# Altium PCB PCB1.PcbDoc (part 1 of 3)
Units mm, origin at the board's own origin, x right, y up, seen from the top; angles counter-clockwise.
Board outline 100 x 100 mm, 2 copper layers (Top Layer, Bottom Layer); 16 components, 62 nets, 154 pads, 113 vias.
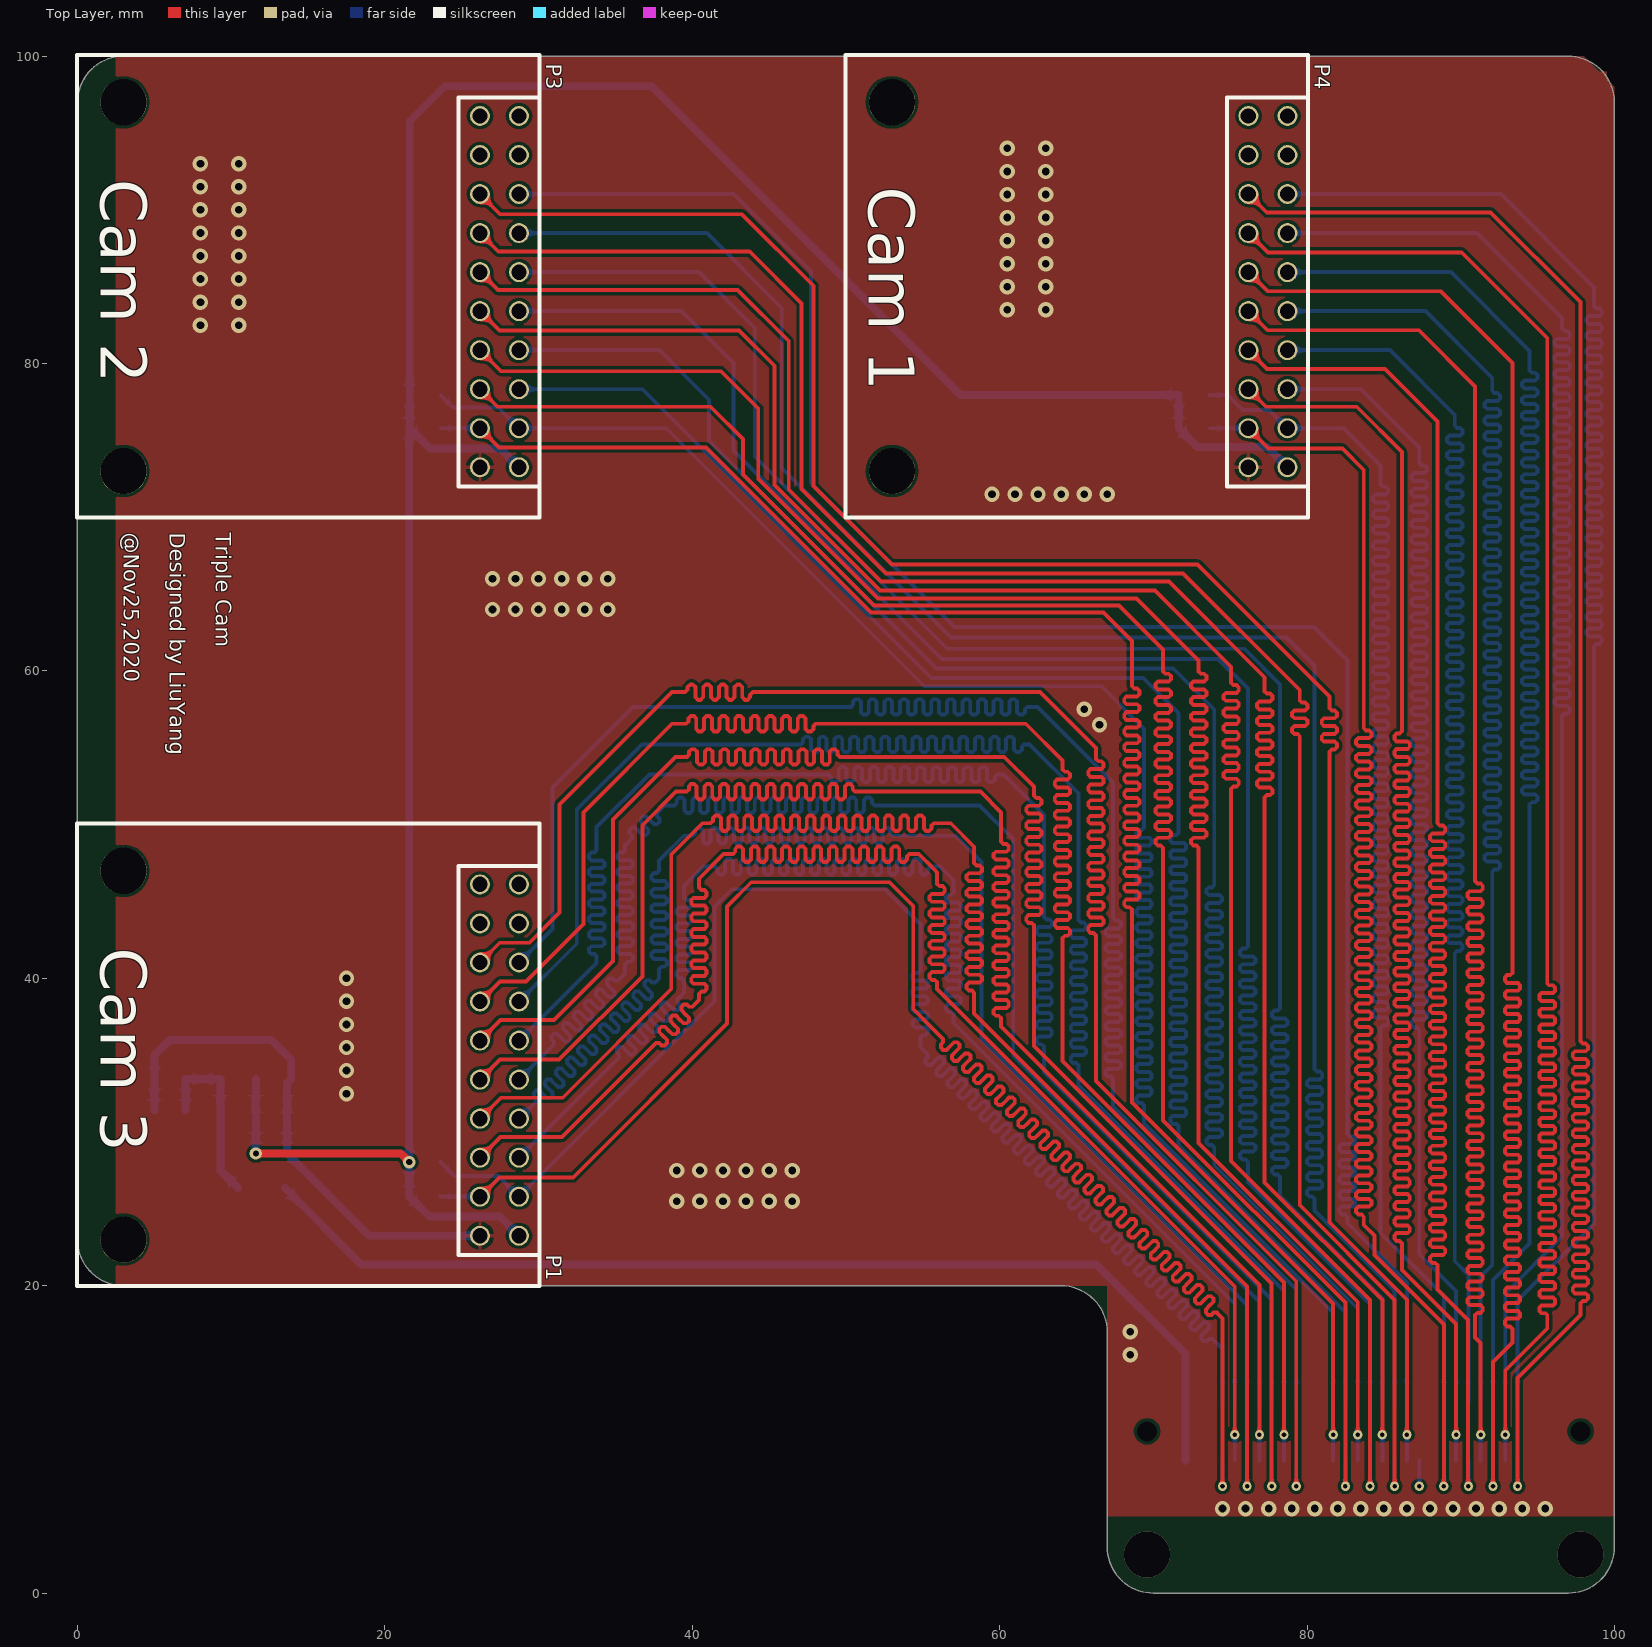
[diagram p0: Top Layer view]
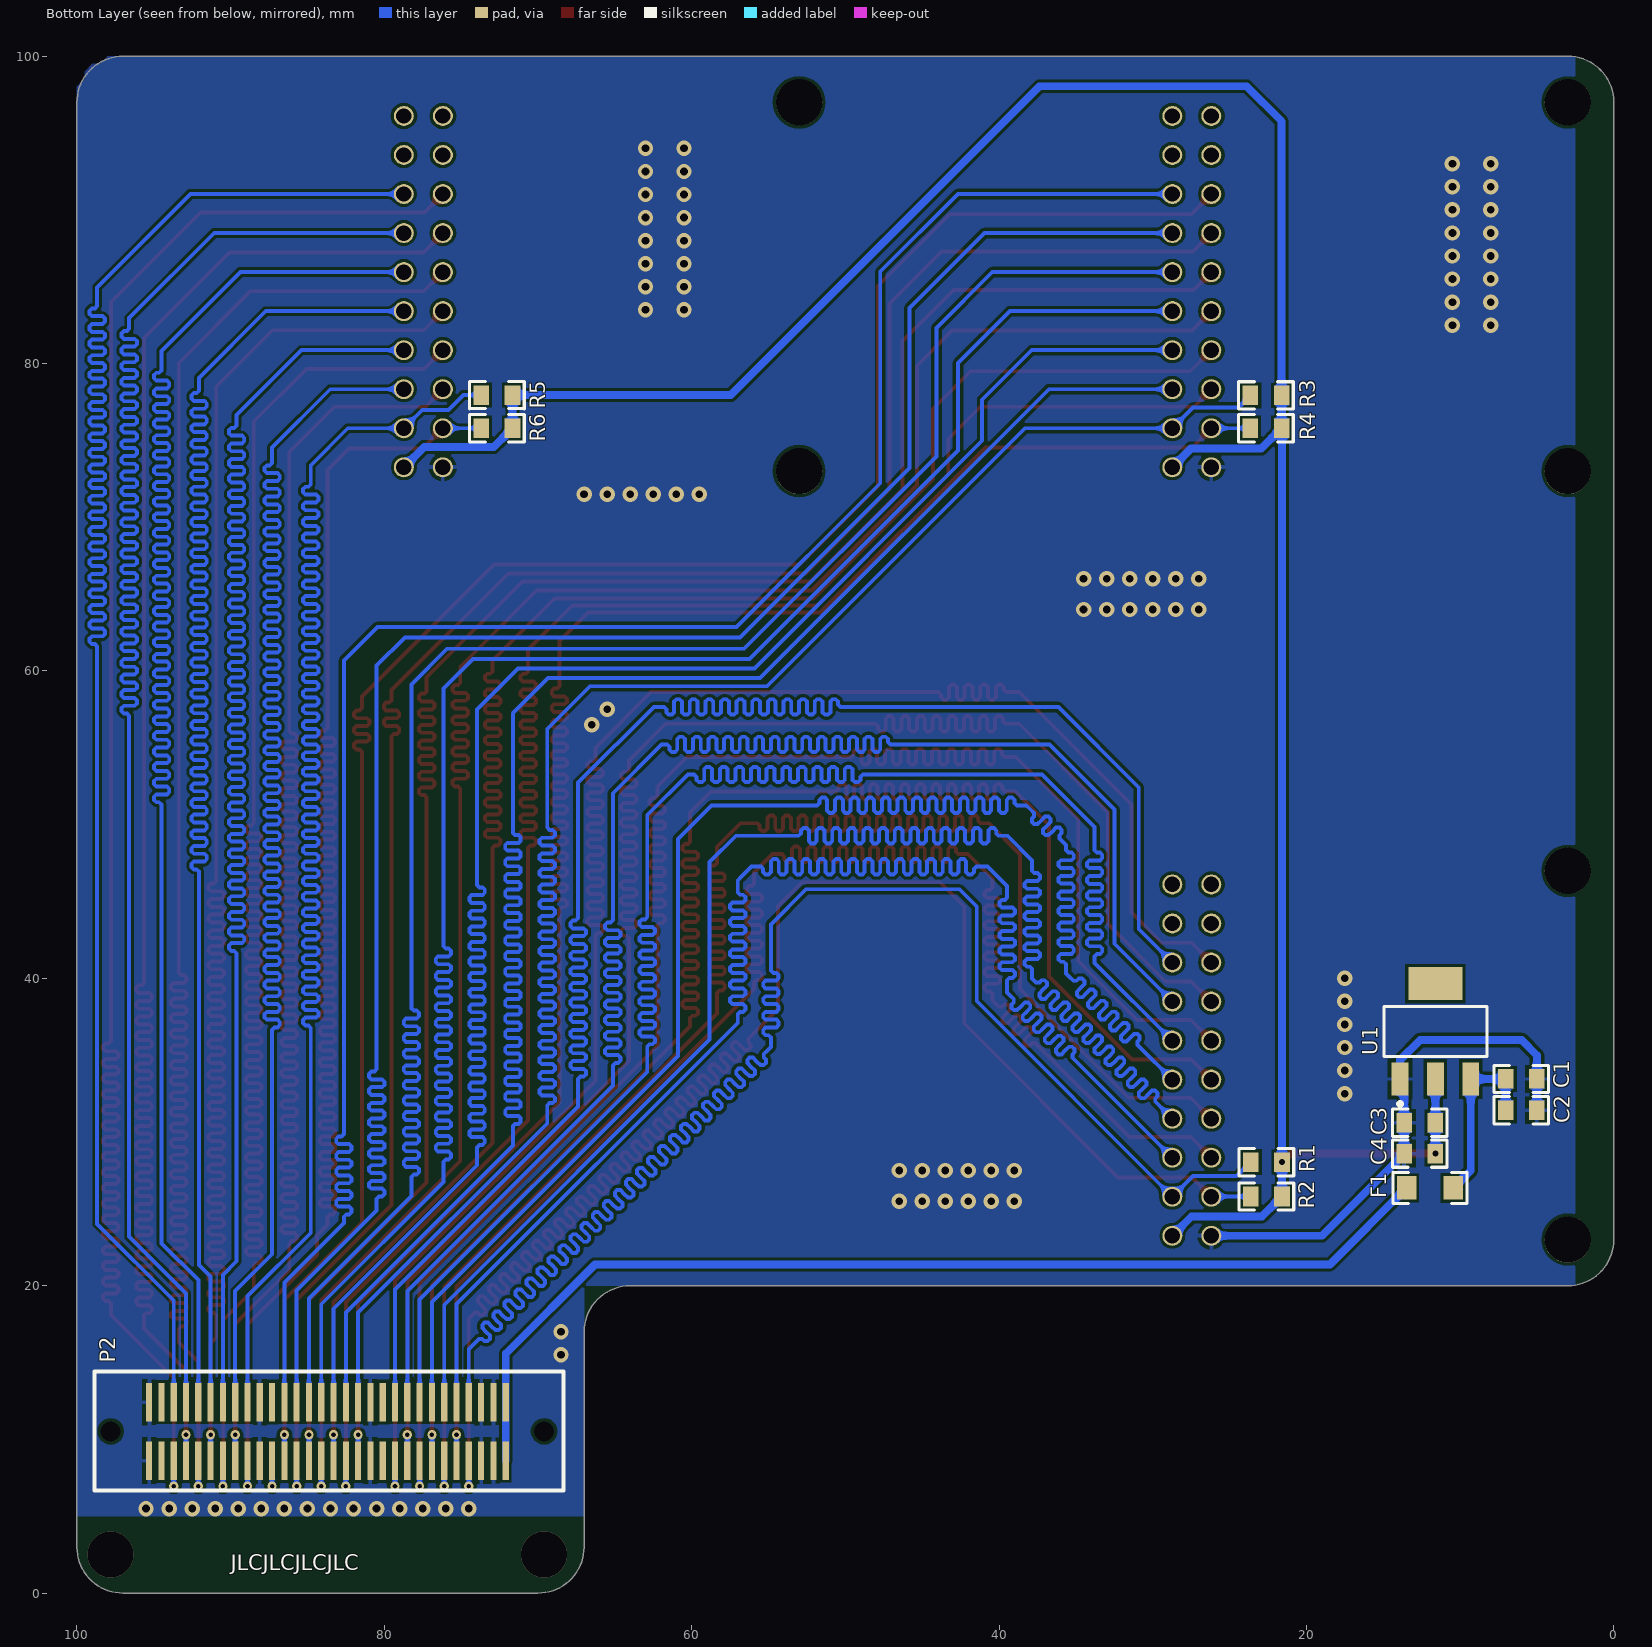
[diagram p1: Bottom Layer view, seen from below]
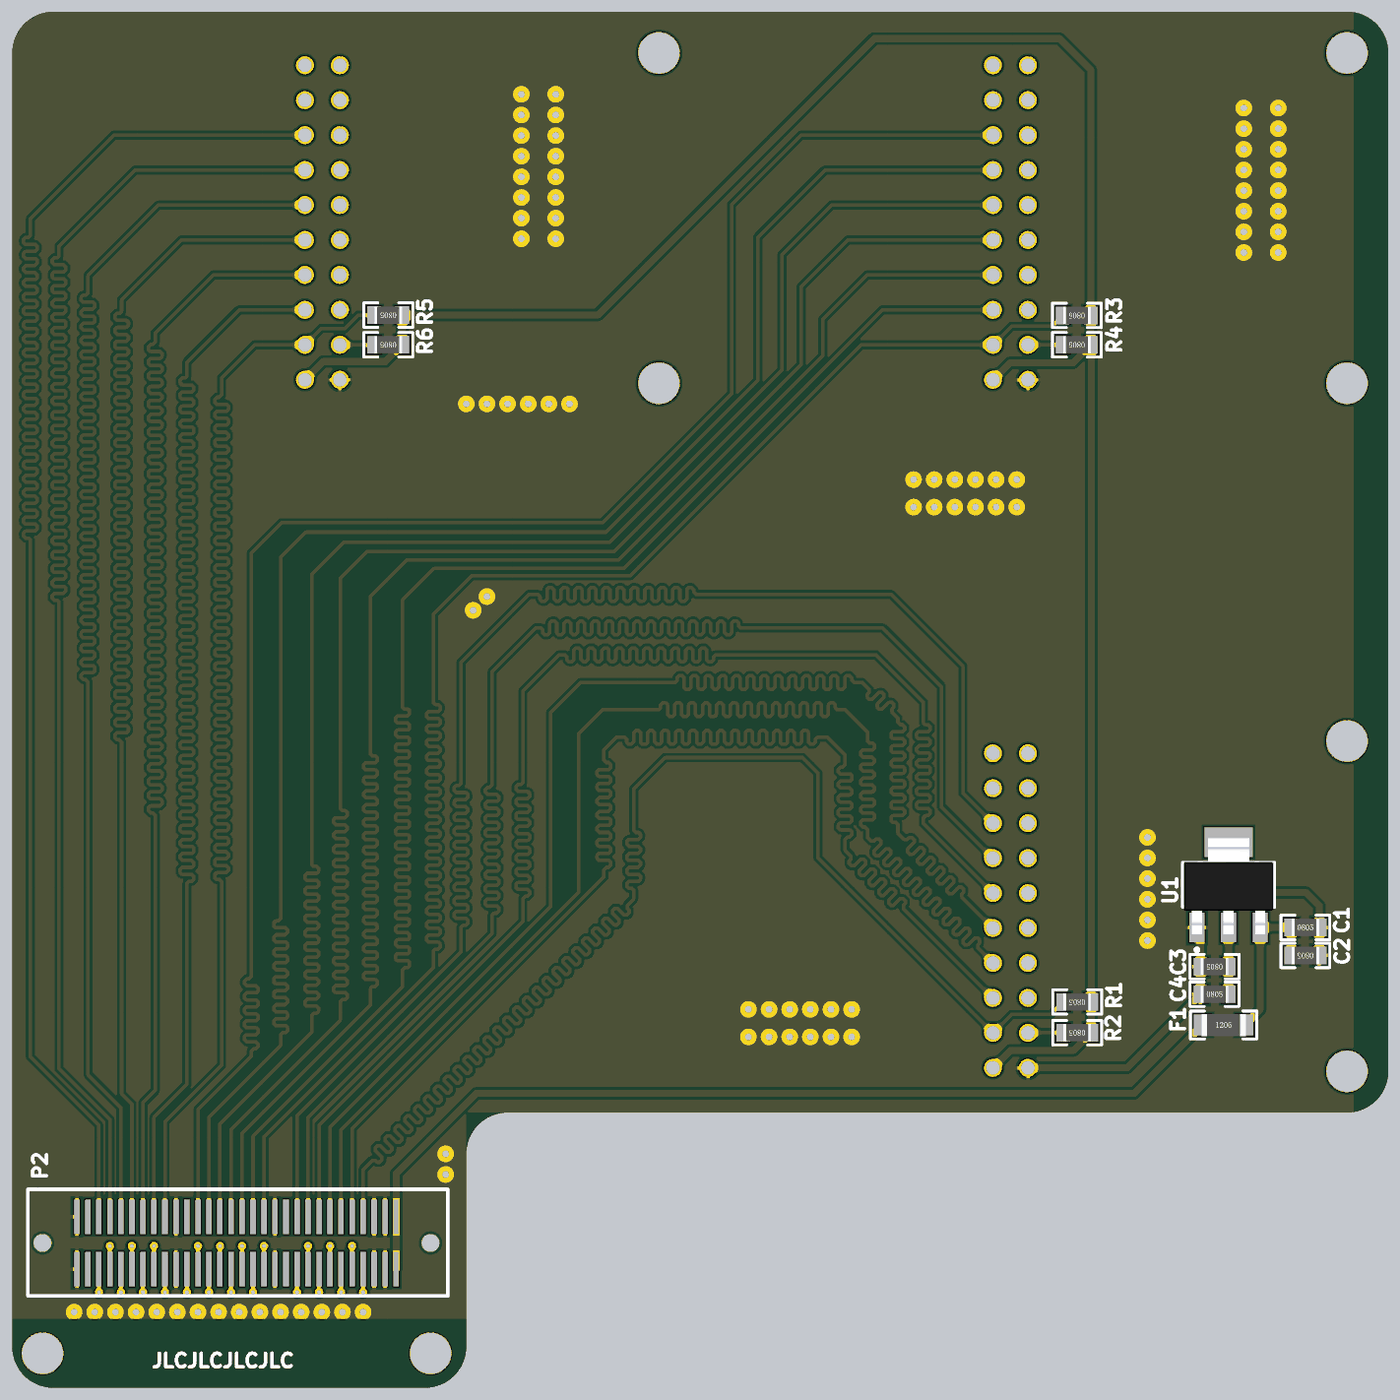
[diagram p4: 3D render of the assembled board from below, using the file's embedded part models]

## Layer stack, top to bottom
Top Solder: solder mask 0.0102, Solder Resist, Dk 3.5
Top Layer: signal copper 0.0356
Dielectric 1: dielectric 0.32, FR-4, Dk 4.8
Bottom Layer: signal copper 0.0356
Bottom Solder: solder mask 0.0102, Solder Resist, Dk 3.5

## Board outline
3,20 cw(c3,23) 0,23 0,97 cw(c3,97) 3,100 97,100 cw(c97,97) 100,97 100,3 cw(c97,3) 97,0 70,0 cw(c70,3) 67,3 67,16.975 ccw(c63.987,16.987) 64,20

## Design rules (kind name [scope] priority, off if disabled: settings)
Clearance [All] p1: gap=0.2
Length [InNetClass('C1')] p1: maxlimit=134 minlimit=132
PolygonConnect [All] p1: connectstyle=Relief reliefconductorwidth=0.254 reliefentries=4 polygonreliefangle="90 Angle" airgapwidth=0.254
RoutingVias [All] p1: holewidth=0.3 width=0.6 viastyle="Through Hole" minholewidth=0.3 minwidth=0.6 maxholewidth=6 maxwidth=10
SolderMaskExpansion [All] p1: expansion=0.102
Width [All] p1: maxlimit=0.508 minlimit=0.127 preferedwidth=0.254
30 further rules are at their usual default settings.

## Classes and differential pairs
net class C1: D0_1 D0_2 D0_3 D1_1 D1_2 D1_3 D2_1 D2_2 D2_3 D3_1 D3_2 D3_3 D4_1 D4_2 D4_3 D5_1 D5_2 D5_3 D6_1 D6_2 D6_3 D7_1 D7_2 D7_3 HS_1 HS_2 HS_3 PCLK_1 PCLK_2 PCLK_3 SCK_1 SCK_2 SCK_3 SDA_1 SDA_2 SDA_3 VS_1 VS_2 VS_3 XCLK_1 XCLK_2 XCLK_3

## Components (designator, comment, footprint, x,y, rotation, side; value= is the part's Value field where it differs from the comment)
C1 "Cap2" R0805 6.02,33.452 r180 bottom
C2 "Cap" R0805 6.02,31.42 r0 bottom
C3 "Cap2" R0805 12.624,30.607 r0 bottom
C4 "Cap" R0805 12.624,28.6 r180 bottom
F1 "Fuse 1" R1206 11.963,26.365 r180 bottom (schematic designator F?)
P1 "Header 10X2" PCBComponent_1 0,20 r90 top locked
P2 "Header 30X2" BTBCON_0.8mm_60P 72.1,12.425 r270 bottom locked
P3 "Header 10X2" PCBComponent_1 0,70 r90 top locked
P4 "Header 10X2" PCBComponent_1 50,70 r90 top locked
R1 "Res1" R0805 22.606,28.042 r0 bottom
R2 "Res1" R0805 22.606,25.806 r0 bottom
R3 "Res1" R0805 22.631,77.927 r0 bottom
R4 "Res1" R0805 22.631,75.794 r0 bottom
R5 "Res1" R0805 72.669,77.953 r0 bottom
R6 "Res1" R0805 72.669,75.794 r0 bottom
U1 "AMS1117-33" "SOT-223   AMS1117" 11.608,36.551 r180 bottom

## Footprints (in the part's own frame and the unit in brackets; to place one, negate y for a bottom-side part, rotate by r counter-clockwise, add the part's x,y. Pads: shape width x height; smd on the part's side, far side on the other; paste and mask are expansions set on the pad)
BTBCON_0.8mm_60P [mm]
  rect 2.5x0.4 smd: 1(0,0) 2(3.8,0) 3(0,-0.8) 4(3.8,-0.8) 5(0,-1.6) 6(3.8,-1.6) 7(0,-2.4) 8(3.8,-2.4) 9(0,-3.2) 10(3.8,-3.2) 11(0,-4) 12(3.8,-4) 13(0,-4.8) 14(3.8,-4.8) 15(0,-5.6) 16(3.8,-5.6) 17(0,-6.4) 18(3.8,-6.4) 19(0,-7.2) 20(3.8,-7.2) 21(0,-8) 22(3.8,-8) 23(0,-8.8) 24(3.8,-8.8) 25(0,-9.6) 26(3.8,-9.6) 27(0,-10.4) 28(3.8,-10.4) 29(0,-11.2) 30(3.8,-11.2) 31(0,-12) 32(3.8,-12) 33(0,-12.8) 34(3.8,-12.8) 35(0,-13.6) 36(3.8,-13.6) 37(0,-14.4) 38(3.8,-14.4) 39(0,-15.2) 40(3.8,-15.2) 41(0,-16) 42(3.8,-16) 43(0,-16.8) 44(3.8,-16.8) 45(0,-17.6) 46(3.8,-17.6) 47(0,-18.4) 48(3.8,-18.4) 49(0,-19.2) 50(3.8,-19.2) 51(0,-20) 52(3.8,-20) 53(0,-20.8) 54(3.8,-20.8) 55(0,-21.6) 56(3.8,-21.6) 57(0,-22.4) 58(3.8,-22.4) 59(0,-23.2) 60(3.8,-23.2)
  round 1 hole 1.3: 61(1.9,2.5) 62(1.9,-25.7)
  silkscreen extent -2,-26.75 5.75,3.75
PCBComponent_1 [mm]
  round 3 hole 3: 0(3,-3) 0(27,-3)
  round 1.3 hole 1: 1(3.251,-28.727) 2(3.251,-26.187) 3(5.791,-28.727) 4(5.791,-26.187) 5(8.331,-28.727) 6(8.331,-26.187) 7(10.871,-28.727) 8(10.871,-26.187) 9(13.411,-28.727) 10(13.411,-26.187) 11(15.951,-28.727) 12(15.951,-26.187) 13(18.491,-28.727) 14(18.491,-26.187) 15(21.031,-28.727) 16(21.031,-26.187) 17(23.571,-28.727) 18(23.571,-26.187) 19(26.111,-28.727) 20(26.111,-26.187)
  silkscreen extent -0.01,-30.06 30.09,0.04
R0805 [mil]
  rect 40x50 smd: 1(-40,0) 2(40,0)
  silkscreen extent -70,-35 70,35, body extent -39,-25 39,25, height 22
R1206 [mil]
  rect 50x60 smd: 1(-60,0) 2(60,0)
  silkscreen extent -95,-40 95,40, body extent -63,-31 63,31, height 24
"SOT-223   AMS1117" [mm] "SOT-223/SC-73; 4 Leads; Body 6.7 x 7.3 mm, inc. leads (LxW max)"
  rect 1.1x2.15 smd: 1(-2.3,-3.1) 2(0,-3.1) 3(2.3,-3.1)
  rect 3.5x2.15 smd: 4(0,3.1)
  silkscreen extent -3.35,-4.85 3.35,1.63, body extent -3.25,-3.58 3.25,3.38, height 1.65

## Part data
C1 C2 C3 C4: "Capacitor"
F1: "Fuse"
P1 P3 P4: "Header, 10-Pin, Dual row"
P2: "Header, 30-Pin, Dual row"
R1 R2 R3 R4 R5 R6: "Resistor"
U1: library part "Volt Reg", "Voltage Regulator"

## Via types
v1: diameter 1, hole 0.5, Top Layer to Bottom Layer, 87 vias
v2: diameter 0.6, hole 0.3, Top Layer to Bottom Layer, 22 vias
v3: diameter 0.8, hole 0.4, Top Layer to Bottom Layer, 2 vias
v4: diameter 3, hole 3, Top Layer to Bottom Layer, 2 vias

## Nets (pads, with @x,y where several pads share a name; then routed paths per layer and width w, separated by ;. In a path a pad name is that pad's centre, name@x,y a point inside that pad or via, vN(x,y) a via of type N, cw(c..) or ccw(c..) an arc to the next point about the centre after c; other vN are vias at no path point)
3V3: C3.1 C4.2 P1.1 P3.1 P4.1 R1.1 R2.1 R3.1 R4.1 R5.1 R6.1 U1.2 | length 171
  Top Layer w0.508: v3(11.608,28.6) 21.031,28.6 v3(21.59,28.042)
  Bottom Layer w0.508: v3(11.608,28.6) U1.2@11.608,33.451 ; P1.1@28.727,23.251 27.468,24.511 22.885,24.511 R2.1@21.59,25.806 v3(21.59,28.042) 21.59,75.768 R4.1@21.615,75.794 ; P3.1@28.727,73.251 27.506,74.473 22.936,74.473 R4.1@21.615,75.794 ; P4.1@78.727,73.251 77.404,74.574 72.873,74.574 R6.1@71.653,75.794 R5.1@71.653,77.953 57.455,77.953 37.363,98.044 23.901,98.044 21.615,95.758 R3.1@21.615,77.927 R4.1@21.615,75.794
5V: F1.1 P2.1 P2.2 | length 70
  Bottom Layer w0.508: F1.1@13.487,26.365 18.466,21.387 66.294,21.387 72.1,15.581 P2.1@72.1,12.425 P2.2@72.1,8.625
D0_1: P1.16 P2.20 | length 132.1
  Top Layer w0.254: P1.16@26.187,41.031 27.473,42.316 29.413,42.316 31.369,44.272 31.369,51.308 38.684,58.623 39.446,58.623 39.522,58.623 39.7,58.801 39.7,58.945 39.878,59.123 40.03,59.123 40.208,58.945 40.208,58.623 40.208,58.301 40.386,58.123 40.538,58.123 40.716,58.301 40.716,58.623 40.716,58.945 40.894,59.123 41.046,59.123 41.224,58.945 41.224,58.623 41.224,58.301 41.402,58.123 41.554,58.123 41.732,58.301 41.732,58.623 41.732,58.945 41.91,59.123 42.062,59.123 42.24,58.945 42.24,58.623 42.24,58.301 42.418,58.123 42.57,58.123 42.748,58.301 42.748,58.623 42.748,58.945 42.926,59.123 43.078,59.123 43.256,58.945 43.256,58.623 43.256,58.301 43.434,58.123 43.586,58.123 43.764,58.301 43.764,58.445 43.942,58.623 47.854,58.623 62.636,58.623 66.269,54.991 66.269,54.381 66.269,54.28 66.421,54.127 66.616,54.127 66.769,53.975 66.769,53.772 66.616,53.619 66.269,53.619 65.921,53.619 65.769,53.467 65.769,53.264 65.921,53.111 66.269,53.111 66.616,53.111 66.769,52.959 66.769,52.756 66.616,52.603 66.269,52.603 65.921,52.603 65.769,52.451 65.769,52.248 65.921,52.095 66.269,52.095 66.616,52.095 66.769,51.943 66.769,51.74 66.616,51.587 66.269,51.587 65.921,51.587 65.769,51.435 65.769,51.232 65.921,51.079 66.269,51.079 66.616,51.079 66.769,50.927 66.769,50.724 66.616,50.571 66.269,50.571 65.921,50.571 65.769,50.419 65.769,50.216 65.921,50.063 66.269,50.063 66.616,50.063 66.769,49.911 66.769,49.708 66.616,49.555 66.269,49.555 65.921,49.555 65.769,49.403 65.769,49.2 65.921,49.047 66.269,49.047 66.616,49.047 66.769,48.895 66.769,48.692 66.616,48.539 66.269,48.539 65.921,48.539 65.769,48.387 65.769,48.184 65.921,48.031 66.269,48.031 66.616,48.031 66.769,47.879 66.769,47.676 66.616,47.523 66.269,47.523 65.921,47.523 65.769,47.371 65.769,47.168 65.921,47.015 66.269,47.015 66.616,47.015 66.769,46.863 66.769,46.66 66.616,46.507 66.269,46.507 65.921,46.507 65.769,46.355 65.769,46.152 65.921,45.999 66.269,45.999 66.616,45.999 66.769,45.847 66.769,45.644 66.616,45.491 66.269,45.491 65.921,45.491 65.769,45.339 65.769,45.136 65.921,44.983 66.269,44.983 66.616,44.983 66.769,44.831 66.769,44.628 66.616,44.475 66.269,44.475 65.921,44.475 65.769,44.323 65.769,44.12 65.921,43.967 66.269,43.967 66.616,43.967 66.769,43.815 66.769,43.612 66.616,43.459 66.269,43.459 65.921,43.459 65.769,43.307 65.769,43.104 65.921,42.951 66.116,42.951 66.269,42.799 66.269,42.545 66.269,33.325 79.3,20.293 v2(79.3,6.948)
  Bottom Layer w0.254: v2(79.3,6.948) P2.20@79.3,8.625
D0_2: P2.38 P3.16 | length 132.2
  Top Layer w0.254: P3.16@26.187,91.031 27.506,89.713 43.231,89.713 47.879,85.065 47.879,72.034 52.984,66.929 72.873,66.929 81.458,58.344 81.458,57.683 81.458,57.582 81.61,57.429 81.805,57.429 81.958,57.277 81.958,57.074 81.805,56.921 81.458,56.921 81.11,56.921 80.958,56.769 80.958,56.566 81.11,56.413 81.458,56.413 81.805,56.413 81.958,56.261 81.958,56.058 81.805,55.905 81.458,55.905 81.11,55.905 80.958,55.753 80.958,55.55 81.11,55.397 81.458,55.397 81.805,55.397 81.958,55.245 81.958,55.042 81.805,54.889 81.61,54.889 81.458,54.737 81.458,54.432 81.458,24.13 86.5,19.088 v2(86.5,10.302)
  Bottom Layer w0.254: P2.38@86.5,8.625 v2(86.5,10.302)
D0_3: P2.56 P4.16 | length 131.9
  Top Layer w0.254: P4.16@76.187,91.031 77.379,89.84 91.948,89.84 97.79,83.998 97.79,36.449 97.79,35.916 97.942,35.763 98.138,35.763 98.29,35.611 98.29,35.408 98.138,35.255 97.79,35.255 97.442,35.255 97.29,35.103 97.29,34.9 97.442,34.747 97.79,34.747 98.138,34.747 98.29,34.595 98.29,34.392 98.138,34.239 97.79,34.239 97.442,34.239 97.29,34.087 97.29,33.884 97.442,33.731 97.79,33.731 98.138,33.731 98.29,33.579 98.29,33.376 98.138,33.223 97.79,33.223 97.442,33.223 97.29,33.071 97.29,32.868 97.442,32.715 97.79,32.715 98.138,32.715 98.29,32.563 98.29,32.36 98.138,32.207 97.79,32.207 97.442,32.207 97.29,32.055 97.29,31.852 97.442,31.699 97.79,31.699 98.138,31.699 98.29,31.547 98.29,31.344 98.138,31.191 97.79,31.191 97.442,31.191 97.29,31.039 97.29,30.836 97.442,30.683 97.79,30.683 98.138,30.683 98.29,30.531 98.29,30.328 98.138,30.175 97.79,30.175 97.442,30.175 97.29,30.023 97.29,29.82 97.442,29.667 97.79,29.667 98.138,29.667 98.29,29.515 98.29,29.312 98.138,29.159 97.79,29.159 97.442,29.159 97.29,29.007 97.29,28.804 97.442,28.651 97.79,28.651 98.138,28.651 98.29,28.499 98.29,28.296 98.138,28.143 97.79,28.143 97.442,28.143 97.29,27.991 97.29,27.788 97.442,27.635 97.79,27.635 98.138,27.635 98.29,27.483 98.29,27.28 98.138,27.127 97.79,27.127 97.442,27.127 97.29,26.975 97.29,26.772 97.442,26.619 97.79,26.619 98.138,26.619 98.29,26.467 98.29,26.264 98.138,26.111 97.79,26.111 97.442,26.111 97.29,25.959 97.29,25.756 97.442,25.603 97.79,25.603 98.138,25.603 98.29,25.451 98.29,25.248 98.138,25.095 97.79,25.095 97.442,25.095 97.29,24.943 97.29,24.74 97.442,24.587 97.79,24.587 98.138,24.587 98.29,24.435 98.29,24.232 98.138,24.079 97.79,24.079 97.442,24.079 97.29,23.927 97.29,23.724 97.442,23.571 97.79,23.571 98.138,23.571 98.29,23.419 98.29,23.216 98.138,23.063 97.79,23.063 97.442,23.063 97.29,22.911 97.29,22.708 97.442,22.555 97.79,22.555 98.138,22.555 98.29,22.403 98.29,22.2 98.138,22.047 97.79,22.047 97.442,22.047 97.29,21.895 97.29,21.692 97.442,21.539 97.79,21.539 98.138,21.539 98.29,21.387 98.29,21.184 98.138,21.031 97.79,21.031 97.442,21.031 97.29,20.879 97.29,20.676 97.442,20.523 97.79,20.523 98.138,20.523 98.29,20.371 98.29,20.168 98.138,20.015 97.79,20.015 97.442,20.015 97.29,19.863 97.29,19.66 97.442,19.507 97.79,19.507 98.138,19.507 98.29,19.355 98.29,19.152 98.138,18.999 97.942,18.999 97.79,18.847 97.79,18.491 97.79,18.237 97.79,18.085 93.7,13.995 v2(93.7,6.948)
  Bottom Layer w0.254: v2(93.7,6.948) P2.56@93.7,8.625
D1_1: P1.15 P2.19 | length 132.4
  Bottom Layer w0.254: P1.15@28.727,41.031 30.912,43.216 30.912,52.426 36.144,57.658 48.438,57.658 50.317,57.658 50.47,57.81 50.47,58.006 50.622,58.158 50.825,58.158 50.978,58.006 50.978,57.658 50.978,57.31 51.13,57.158 51.333,57.158 51.486,57.31 51.486,57.658 51.486,58.006 51.638,58.158 51.841,58.158 51.994,58.006 51.994,57.658 51.994,57.31 52.146,57.158 52.349,57.158 52.502,57.31 52.502,57.658 52.502,58.006 52.654,58.158 52.857,58.158 53.01,58.006 53.01,57.658 53.01,57.31 53.162,57.158 53.365,57.158 53.518,57.31 53.518,57.658 53.518,58.006 53.67,58.158 53.873,58.158 54.026,58.006 54.026,57.658 54.026,57.31 54.178,57.158 54.381,57.158 54.534,57.31 54.534,57.658 54.534,58.006 54.686,58.158 54.889,58.158 55.042,58.006 55.042,57.658 55.042,57.31 55.194,57.158 55.397,57.158 55.55,57.31 55.55,57.658 55.55,58.006 55.702,58.158 55.905,58.158 56.058,58.006 56.058,57.658 56.058,57.31 56.21,57.158 56.413,57.158 56.566,57.31 56.566,57.658 56.566,58.006 56.718,58.158 56.921,58.158 57.074,58.006 57.074,57.658 57.074,57.31 57.226,57.158 57.429,57.158 57.582,57.31 57.582,57.658 57.582,58.006 57.734,58.158 57.937,58.158 58.09,58.006 58.09,57.658 58.09,57.31 58.242,57.158 58.445,57.158 58.598,57.31 58.598,57.658 58.598,58.006 58.75,58.158 58.953,58.158 59.106,58.006 59.106,57.658 59.106,57.31 59.258,57.158 59.461,57.158 59.614,57.31 59.614,57.658 59.614,58.006 59.766,58.158 59.969,58.158 60.122,58.006 60.122,57.658 60.122,57.31 60.274,57.158 60.477,57.158 60.63,57.31 60.63,57.658 60.63,58.006 60.782,58.158 60.985,58.158 61.138,58.006 61.138,57.658 61.138,57.31 61.29,57.158 61.493,57.158 61.646,57.31 61.646,57.506 61.798,57.658 61.9,57.658 62.459,57.658 67.386,52.73 67.386,44.12 67.386,43.917 67.539,43.764 67.734,43.764 67.886,43.612 67.886,43.409 67.734,43.256 67.386,43.256 67.039,43.256 66.886,43.104 66.886,42.901 67.039,42.748 67.386,42.748 67.734,42.748 67.886,42.596 67.886,42.393 67.734,42.24 67.386,42.24 67.039,42.24 66.886,42.088 66.886,41.885 67.039,41.732 67.386,41.732 67.734,41.732 67.886,41.58 67.886,41.377 67.734,41.224 67.386,41.224 67.039,41.224 66.886,41.072 66.886,40.869 67.039,40.716 67.386,40.716 67.734,40.716 67.886,40.564 67.886,40.361 67.734,40.208 67.386,40.208 67.039,40.208 66.886,40.056 66.886,39.853 67.039,39.7 67.386,39.7 67.734,39.7 67.886,39.548 67.886,39.345 67.734,39.192 67.386,39.192 67.039,39.192 66.886,39.04 66.886,38.837 67.039,38.684 67.386,38.684 67.734,38.684 67.886,38.532 67.886,38.329 67.734,38.176 67.386,38.176 67.039,38.176 66.886,38.024 66.886,37.821 67.039,37.668 67.386,37.668 67.734,37.668 67.886,37.516 67.886,37.313 67.734,37.16 67.386,37.16 67.039,37.16 66.886,37.008 66.886,36.805 67.039,36.652 67.386,36.652 67.734,36.652 67.886,36.5 67.886,36.297 67.734,36.144 67.386,36.144 67.039,36.144 66.886,35.992 66.886,35.789 67.039,35.636 67.386,35.636 67.734,35.636 67.886,35.484 67.886,35.281 67.734,35.128 67.386,35.128 67.039,35.128 66.886,34.976 66.886,34.773 67.039,34.62 67.386,34.62 67.734,34.62 67.886,34.468 67.886,34.265 67.734,34.112 67.386,34.112 67.039,34.112 66.886,33.96 66.886,33.757 67.039,33.604 67.234,33.604 67.386,33.452 67.386,33.35 67.386,31.674 79.3,19.76 P2.19@79.3,12.425
D1_2: P2.37 P3.15 | length 132.4
  Bottom Layer w0.254: P3.15@28.727,91.031 42.674,91.031 47.727,85.979 47.727,72.212 57.074,62.865 80.442,62.865 82.626,60.681 82.626,30.302 82.626,29.87 82.779,29.718 82.974,29.718 83.126,29.566 83.126,29.362 82.974,29.21 82.626,29.21 82.279,29.21 82.126,29.058 82.126,28.854 82.279,28.702 82.626,28.702 82.974,28.702 83.126,28.55 83.126,28.346 82.974,28.194 82.626,28.194 82.279,28.194 82.126,28.042 82.126,27.838 82.279,27.686 82.626,27.686 82.974,27.686 83.126,27.534 83.126,27.33 82.974,27.178 82.626,27.178 82.279,27.178 82.126,27.026 82.126,26.822 82.279,26.67 82.626,26.67 82.974,26.67 83.126,26.518 83.126,26.314 82.974,26.162 82.626,26.162 82.279,26.162 82.126,26.01 82.126,25.806 82.279,25.654 82.626,25.654 82.974,25.654 83.126,25.502 83.126,25.298 82.974,25.146 82.626,25.146 82.279,25.146 82.126,24.994 82.126,24.79 82.279,24.638 82.474,24.638 82.626,24.486 82.626,24.384 82.626,24.079 86.5,20.205 P2.37@86.5,12.425
D1_3: P2.55 P4.15 | length 132.2
  Bottom Layer w0.254: P4.15@78.727,91.031 92.611,91.031 98.679,84.963 98.679,83.845 98.679,83.744 98.831,83.591 99.027,83.591 99.179,83.439 99.179,83.236 99.027,83.083 98.679,83.083 98.331,83.083 98.179,82.931 98.179,82.728 98.331,82.575 98.679,82.575 99.027,82.575 99.179,82.423 99.179,82.22 99.027,82.067 98.679,82.067 98.331,82.067 98.179,81.915 98.179,81.712 98.331,81.559 98.679,81.559 99.027,81.559 99.179,81.407 99.179,81.204 99.027,81.051 98.679,81.051 98.331,81.051 98.179,80.899 98.179,80.696 98.331,80.543 98.679,80.543 99.027,80.543 99.179,80.391 99.179,80.188 99.027,80.035 98.679,80.035 98.331,80.035 98.179,79.883 98.179,79.68 98.331,79.527 98.679,79.527 99.027,79.527 99.179,79.375 99.179,79.172 99.027,79.019 98.679,79.019 98.331,79.019 98.179,78.867 98.179,78.664 98.331,78.511 98.679,78.511 99.027,78.511 99.179,78.359 99.179,78.156 99.027,78.003 98.679,78.003 98.331,78.003 98.179,77.851 98.179,77.648 98.331,77.495 98.679,77.495 99.027,77.495 99.179,77.343 99.179,77.14 99.027,76.987 98.679,76.987 98.331,76.987 98.179,76.835 98.179,76.632 98.331,76.479 98.679,76.479 99.027,76.479 99.179,76.327 99.179,76.124 99.027,75.971 98.679,75.971 98.331,75.971 98.179,75.819 98.179,75.616 98.331,75.463 98.679,75.463 99.027,75.463 99.179,75.311 99.179,75.108 99.027,74.955 98.679,74.955 98.331,74.955 98.179,74.803 98.179,74.6 98.331,74.447 98.679,74.447 99.027,74.447 99.179,74.295 99.179,74.092 99.027,73.939 98.679,73.939 98.331,73.939 98.179,73.787 98.179,73.584 98.331,73.431 98.679,73.431 99.027,73.431 99.179,73.279 99.179,73.076 99.027,72.923 98.679,72.923 98.331,72.923 98.179,72.771 98.179,72.568 98.331,72.415 98.679,72.415 99.027,72.415 99.179,72.263 99.179,72.06 99.027,71.907 98.679,71.907 98.331,71.907 98.179,71.755 98.179,71.552 98.331,71.399 98.679,71.399 99.027,71.399 99.179,71.247 99.179,71.044 99.027,70.891 98.679,70.891 98.331,70.891 98.179,70.739 98.179,70.536 98.331,70.383 98.679,70.383 99.027,70.383 99.179,70.231 99.179,70.028 99.027,69.875 98.679,69.875 98.331,69.875 98.179,69.723 98.179,69.52 98.331,69.367 98.679,69.367 99.027,69.367 99.179,69.215 99.179,69.012 99.027,68.859 98.679,68.859 98.331,68.859 98.179,68.707 98.179,68.504 98.331,68.351 98.679,68.351 99.027,68.351 99.179,68.199 99.179,67.996 99.027,67.843 98.679,67.843 98.331,67.843 98.179,67.691 98.179,67.488 98.331,67.335 98.679,67.335 99.027,67.335 99.179,67.183 99.179,66.98 99.027,66.827 98.679,66.827 98.331,66.827 98.179,66.675 98.179,66.472 98.331,66.319 98.679,66.319 99.027,66.319 99.179,66.167 99.179,65.964 99.027,65.811 98.679,65.811 98.331,65.811 98.179,65.659 98.179,65.456 98.331,65.303 98.679,65.303 99.027,65.303 99.179,65.151 99.179,64.948 99.027,64.795 98.679,64.795 98.331,64.795 98.179,64.643 98.179,64.44 98.331,64.287 98.679,64.287 99.027,64.287 99.179,64.135 99.179,63.932 99.027,63.779 98.679,63.779 98.331,63.779 98.179,63.627 98.179,63.424 98.331,63.271 98.679,63.271 99.027,63.271 99.179,63.119 99.179,62.916 99.027,62.763 98.679,62.763 98.331,62.763 98.179,62.611 98.179,62.408 98.331,62.255 98.679,62.255 99.027,62.255 99.179,62.103 99.179,61.9 99.027,61.747 98.831,61.747 98.679,61.595 98.679,56.083 98.679,24.028 93.7,19.049 P2.55@93.7,12.425
D2_1: P1.14 P2.18 | length 132.2
  Top Layer w0.254: P1.14@26.187,38.491 27.498,39.802 29.185,39.802 32.918,43.536 32.918,50.8 38.684,56.566 39.497,56.566 39.599,56.566 39.751,56.718 39.751,56.913 39.903,57.066 40.107,57.066 40.259,56.913 40.259,56.566 40.259,56.218 40.411,56.066 40.615,56.066 40.767,56.218 40.767,56.566 40.767,56.913 40.919,57.066 41.123,57.066 41.275,56.913 41.275,56.566 41.275,56.218 41.427,56.066 41.631,56.066 41.783,56.218 41.783,56.566 41.783,56.913 41.935,57.066 42.139,57.066 42.291,56.913 42.291,56.566 42.291,56.218 42.443,56.066 42.647,56.066 42.799,56.218 42.799,56.566 42.799,56.913 42.951,57.066 43.155,57.066 43.307,56.913 43.307,56.566 43.307,56.218 43.459,56.066 43.663,56.066 43.815,56.218 43.815,56.566 43.815,56.913 43.967,57.066 44.171,57.066 44.323,56.913 44.323,56.566 44.323,56.218 44.475,56.066 44.679,56.066 44.831,56.218 44.831,56.566 44.831,56.913 44.983,57.066 45.187,57.066 45.339,56.913 45.339,56.566 45.339,56.218 45.491,56.066 45.695,56.066 45.847,56.218 45.847,56.566 45.847,56.913 45.999,57.066 46.203,57.066 46.355,56.913 46.355,56.566 46.355,56.218 46.507,56.066 46.711,56.066 46.863,56.218 46.863,56.566 46.863,56.913 47.015,57.066 47.219,57.066 47.371,56.913 47.371,56.566 47.371,56.218 47.523,56.066 47.727,56.066 47.879,56.218 47.879,56.413 48.031,56.566 49.708,56.566 61.697,56.566 64.084,54.178 64.084,53.696 64.084,53.594 64.237,53.442 64.432,53.442 64.584,53.289 64.584,53.086 64.432,52.934 64.084,52.934 63.737,52.934 63.584,52.781 63.584,52.578 63.737,52.426 64.084,52.426 64.432,52.426 64.584,52.273 64.584,52.07 64.432,51.918 64.084,51.918 63.737,51.918 63.584,51.765 63.584,51.562 63.737,51.41 64.084,51.41 64.432,51.41 64.584,51.257 64.584,51.054 64.432,50.902 64.084,50.902 63.737,50.902 63.584,50.749 63.584,50.546 63.737,50.394 64.084,50.394 64.432,50.394 64.584,50.241 64.584,50.038 64.432,49.886 64.084,49.886 63.737,49.886 63.584,49.733 63.584,49.53 63.737,49.378 64.084,49.378 64.432,49.378 64.584,49.225 64.584,49.022 64.432,48.87 64.084,48.87 63.737,48.87 63.584,48.717 63.584,48.514 63.737,48.362 64.084,48.362 64.432,48.362 64.584,48.209 64.584,48.006 64.432,47.854 64.084,47.854 63.737,47.854 63.584,47.701 63.584,47.498 63.737,47.346 64.084,47.346 64.432,47.346 64.584,47.193 64.584,46.99 64.432,46.838 64.084,46.838 63.737,46.838 63.584,46.685 63.584,46.482 63.737,46.33 64.084,46.33 64.432,46.33 64.584,46.177 64.584,45.974 64.432,45.822 64.084,45.822 63.737,45.822 63.584,45.669 63.584,45.466 63.737,45.314 64.084,45.314 64.432,45.314 64.584,45.161 64.584,44.958 64.432,44.806 64.084,44.806 63.737,44.806 63.584,44.653 63.584,44.45 63.737,44.298 64.084,44.298 64.432,44.298 64.584,44.145 64.584,43.942 64.432,43.79 64.084,43.79 63.737,43.79 63.584,43.637 63.584,43.434 63.737,43.282 64.084,43.282 64.432,43.282 64.584,43.129 64.584,42.926 64.432,42.774 64.237,42.774 64.084,42.621 64.084,42.443 64.084,34.62 78.5,20.204 v2(78.5,10.302)
  Bottom Layer w0.254: P2.18@78.5,8.625 v2(78.5,10.302)
D2_2: P2.36 P3.14 | length 131.9
  Top Layer w0.254: P3.14@26.187,88.491 27.379,87.3 43.739,87.3 47.117,83.922 47.117,71.831 52.603,66.345 71.933,66.345 79.527,58.75 79.527,58.191 79.527,58.09 79.68,57.937 79.875,57.937 80.027,57.785 80.027,57.582 79.875,57.429 79.527,57.429 79.18,57.429 79.027,57.277 79.027,57.074 79.18,56.921 79.527,56.921 79.875,56.921 80.027,56.769 80.027,56.566 79.875,56.413 79.527,56.413 79.18,56.413 79.027,56.261 79.027,56.058 79.18,55.905 79.375,55.905 79.527,55.753 79.527,52.857 79.527,25.248 85.7,19.075 v2(85.7,6.948)
  Bottom Layer w0.254: v2(85.7,6.948) P2.36@85.7,8.625
D2_3: P2.54 P4.14 | length 132
  Top Layer w0.254: P4.14@76.187,88.491 77.455,87.224 90.068,87.224 95.631,81.661 95.631,41.783 95.631,39.675 95.758,39.548 96.004,39.548 96.131,39.421 96.131,39.167 96.004,39.04 95.631,39.04 95.258,39.04 95.131,38.913 95.131,38.659 95.258,38.532 95.631,38.532 96.004,38.532 96.131,38.405 96.131,38.151 96.004,38.024 95.631,38.024 95.258,38.024 95.131,37.897 95.131,37.643 95.258,37.516 95.631,37.516 96.004,37.516 96.131,37.389 96.131,37.135 96.004,37.008 95.631,37.008 95.258,37.008 95.131,36.881 95.131,36.627 95.258,36.5 95.631,36.5 96.004,36.5 96.131,36.373 96.131,36.119 96.004,35.992 95.631,35.992 95.258,35.992 95.131,35.865 95.131,35.611 95.258,35.484 95.631,35.484 96.004,35.484 96.131,35.357 96.131,35.103 96.004,34.976 95.631,34.976 95.258,34.976 95.131,34.849 95.131,34.595 95.258,34.468 95.631,34.468 96.004,34.468 96.131,34.341 96.131,34.087 96.004,33.96 95.631,33.96 95.258,33.96 95.131,33.833 95.131,33.579 95.258,33.452 95.631,33.452 96.004,33.452 96.131,33.325 96.131,33.071 96.004,32.944 95.631,32.944 95.258,32.944 95.131,32.817 95.131,32.563 95.258,32.436 95.631,32.436 96.004,32.436 96.131,32.309 96.131,32.055 96.004,31.928 95.631,31.928 95.258,31.928 95.131,31.801 95.131,31.547 95.258,31.42 95.631,31.42 96.004,31.42 96.131,31.293 96.131,31.039 96.004,30.912 95.631,30.912 95.258,30.912 95.131,30.785 95.131,30.531 95.258,30.404 95.631,30.404 96.004,30.404 96.131,30.277 96.131,30.023 96.004,29.896 95.631,29.896 95.258,29.896 95.131,29.769 95.131,29.515 95.258,29.388 95.631,29.388 96.004,29.388 96.131,29.261 96.131,29.007 96.004,28.88 95.631,28.88 95.258,28.88 95.131,28.753 95.131,28.499 95.258,28.372 95.631,28.372 96.004,28.372 96.131,28.245 96.131,27.991 96.004,27.864 95.631,27.864 95.258,27.864 95.131,27.737 95.131,27.483 95.258,27.356 95.631,27.356 96.004,27.356 96.131,27.229 96.131,26.975 96.004,26.848 95.631,26.848 95.258,26.848 95.131,26.721 95.131,26.467 95.258,26.34 95.631,26.34 96.004,26.34 96.131,26.213 96.131,25.959 96.004,25.832 95.631,25.832 95.258,25.832 95.131,25.705 95.131,25.451 95.258,25.324 95.631,25.324 96.004,25.324 96.131,25.197 96.131,24.943 96.004,24.816 95.631,24.816 95.258,24.816 95.131,24.689 95.131,24.435 95.258,24.308 95.631,24.308 96.004,24.308 96.131,24.181 96.131,23.927 96.004,23.8 95.631,23.8 95.258,23.8 95.131,23.673 95.131,23.419 95.258,23.292 95.631,23.292 96.004,23.292 96.131,23.165 96.131,22.911 96.004,22.784 95.631,22.784 95.258,22.784 95.131,22.657 95.131,22.403 95.258,22.276 95.631,22.276 96.004,22.276 96.131,22.149 96.131,21.895 96.004,21.768 95.631,21.768 95.258,21.768 95.131,21.641 95.131,21.387 95.258,21.26 95.631,21.26 96.004,21.26 96.131,21.133 96.131,20.879 96.004,20.752 95.631,20.752 95.258,20.752 95.131,20.625 95.131,20.371 95.258,20.244 95.631,20.244 96.004,20.244 96.131,20.117 96.131,19.863 96.004,19.736 95.631,19.736 95.258,19.736 95.131,19.609 95.131,19.355 95.258,19.228 95.631,19.228 96.004,19.228 96.131,19.101 96.131,18.847 96.004,18.72 95.631,18.72 95.258,18.72 95.131,18.593 95.131,18.339 95.258,18.212 95.504,18.212 95.631,18.085 95.631,17.958 95.631,17.221 92.9,14.49 v2(92.9,10.302)
  Bottom Layer w0.254: P2.54@92.9,8.625 v2(92.9,10.302)
D3_1: P1.13 P2.17 | length 132.3
  Bottom Layer w0.254: P1.13@28.727,38.491 32.487,42.25 32.487,50.978 36.728,55.22 44.983,55.22 47.066,55.22 47.219,55.372 47.219,55.567 47.371,55.72 47.574,55.72 47.727,55.567 47.727,55.22 47.727,54.872 47.879,54.72 48.082,54.72 48.235,54.872 48.235,55.22 48.235,55.567 48.387,55.72 48.59,55.72 48.743,55.567 48.743,55.22 48.743,54.872 48.895,54.72 49.098,54.72 49.251,54.872 49.251,55.22 49.251,55.567 49.403,55.72 49.606,55.72 49.759,55.567 49.759,55.22 49.759,54.872 49.911,54.72 50.114,54.72 50.267,54.872 50.267,55.22 50.267,55.567 50.419,55.72 50.622,55.72 50.775,55.567 50.775,55.22 50.775,54.872 50.927,54.72 51.13,54.72 51.283,54.872 51.283,55.22 51.283,55.567 51.435,55.72 51.638,55.72 51.791,55.567 51.791,55.22 51.791,54.872 51.943,54.72 52.146,54.72 52.299,54.872 52.299,55.22 52.299,55.567 52.451,55.72 52.654,55.72 52.807,55.567 52.807,55.22 52.807,54.872 52.959,54.72 53.162,54.72 53.315,54.872 53.315,55.22 53.315,55.567 53.467,55.72 53.67,55.72 53.823,55.567 53.823,55.22 53.823,54.872 53.975,54.72 54.178,54.72 54.331,54.872 54.331,55.22 54.331,55.567 54.483,55.72 54.686,55.72 54.839,55.567 54.839,55.22 54.839,54.872 54.991,54.72 55.194,54.72 55.347,54.872 55.347,55.22 55.347,55.567 55.499,55.72 55.702,55.72 55.855,55.567 55.855,55.22 55.855,54.872 56.007,54.72 56.21,54.72 56.363,54.872 56.363,55.22 56.363,55.567 56.515,55.72 56.718,55.72 56.871,55.567 56.871,55.22 56.871,54.872 57.023,54.72 57.226,54.72 57.379,54.872 57.379,55.22 57.379,55.567 57.531,55.72 57.734,55.72 57.887,55.567 57.887,55.22 57.887,54.872 58.039,54.72 58.242,54.72 58.395,54.872 58.395,55.22 58.395,55.567 58.547,55.72 58.75,55.72 58.903,55.567 58.903,55.22 58.903,54.872 59.055,54.72 59.258,54.72 59.411,54.872 59.411,55.22 59.411,55.567 59.563,55.72 59.766,55.72 59.919,55.567 59.919,55.22 59.919,54.872 60.071,54.72 60.274,54.72 60.427,54.872 60.427,55.22 60.427,55.567 60.579,55.72 60.782,55.72 60.935,55.567 60.935,55.22 60.935,54.872 61.087,54.72 61.29,54.72 61.443,54.872 61.443,55.067 61.595,55.22 61.697,55.22 61.951,55.22 65.126,52.045 65.126,44.018 65.126,43.79 65.278,43.637 65.473,43.637 65.626,43.485 65.626,43.282 65.473,43.129 65.126,43.129 64.778,43.129 64.626,42.977 64.626,42.774 64.778,42.621 65.126,42.621 65.473,42.621 65.626,42.469 65.626,42.266 65.473,42.113 65.126,42.113 64.778,42.113 64.626,41.961 64.626,41.758 64.778,41.605 65.126,41.605 65.473,41.605 65.626,41.453 65.626,41.25 65.473,41.097 65.126,41.097 64.778,41.097 64.626,40.945 64.626,40.742 64.778,40.589 65.126,40.589 65.473,40.589 65.626,40.437 65.626,40.234 65.473,40.081 65.126,40.081 64.778,40.081 64.626,39.929 64.626,39.726 64.778,39.573 65.126,39.573 65.473,39.573 65.626,39.421 65.626,39.218 65.473,39.065 65.126,39.065 64.778,39.065 64.626,38.913 64.626,38.71 64.778,38.557 65.126,38.557 65.473,38.557 65.626,38.405 65.626,38.202 65.473,38.049 65.126,38.049 64.778,38.049 64.626,37.897 64.626,37.694 64.778,37.541 65.126,37.541 65.473,37.541 65.626,37.389 65.626,37.186 65.473,37.033 65.126,37.033 64.778,37.033 64.626,36.881 64.626,36.678 64.778,36.525 65.126,36.525 65.473,36.525 65.626,36.373 65.626,36.17 65.473,36.017 65.126,36.017 64.778,36.017 64.626,35.865 64.626,35.662 64.778,35.509 65.126,35.509 65.473,35.509 65.626,35.357 65.626,35.154 65.473,35.001 65.126,35.001 64.778,35.001 64.626,34.849 64.626,34.646 64.778,34.493 64.973,34.493 65.126,34.341 65.126,34.239 65.126,33.02 78.5,19.646 P2.17@78.5,12.425
D3_2: P2.35 P3.13 | length 132.6
  Bottom Layer w0.254: P3.13@28.727,88.491 40.947,88.491 45.822,83.617 45.822,73.203 56.845,62.179 78.664,62.179 80.493,60.35 80.493,36.881 80.493,34.087 80.645,33.934 80.84,33.934 80.993,33.782 80.993,33.579 80.84,33.426 80.493,33.426 80.145,33.426 79.993,33.274 79.993,33.071 80.145,32.918 80.493,32.918 80.84,32.918 80.993,32.766 80.993,32.563 80.84,32.41 80.493,32.41 80.145,32.41 79.993,32.258 79.993,32.055 80.145,31.902 80.493,31.902 80.84,31.902 80.993,31.75 80.993,31.547 80.84,31.394 80.493,31.394 80.145,31.394 79.993,31.242 79.993,31.039 80.145,30.886 80.493,30.886 80.84,30.886 80.993,30.734 80.993,30.531 80.84,30.378 80.493,30.378 80.145,30.378 79.993,30.226 79.993,30.023 80.145,29.87 80.493,29.87 80.84,29.87 80.993,29.718 80.993,29.515 80.84,29.362 80.493,29.362 80.145,29.362 79.993,29.21 79.993,29.007 80.145,28.854 80.493,28.854 80.84,28.854 80.993,28.702 80.993,28.499 80.84,28.346 80.493,28.346 80.145,28.346 79.993,28.194 79.993,27.991 80.145,27.838 80.493,27.838 80.84,27.838 80.993,27.686 80.993,27.483 80.84,27.33 80.493,27.33 80.145,27.33 79.993,27.178 79.993,26.975 80.145,26.822 80.493,26.822 80.84,26.822 80.993,26.67 80.993,26.467 80.84,26.314 80.493,26.314 80.145,26.314 79.993,26.162 79.993,25.959 80.145,25.806 80.34,25.806 80.493,25.654 80.493,25.552 80.493,24.892 85.7,19.685 P2.35@85.7,12.425
D3_3: P2.53 P4.13 | length 132.3
  Bottom Layer w0.254: P4.13@78.727,88.491 91.061,88.491 96.596,82.956 96.596,82.372 96.596,82.271 96.749,82.118 96.944,82.118 97.096,81.966 97.096,81.763 96.944,81.61 96.596,81.61 96.249,81.61 96.096,81.458 96.096,81.255 96.249,81.102 96.596,81.102 96.944,81.102 97.096,80.95 97.096,80.747 96.944,80.594 96.596,80.594 96.249,80.594 96.096,80.442 96.096,80.239 96.249,80.086 96.596,80.086 96.944,80.086 97.096,79.934 97.096,79.731 96.944,79.578 96.596,79.578 96.249,79.578 96.096,79.426 96.096,79.223 96.249,79.07 96.596,79.07 96.944,79.07 97.096,78.918 97.096,78.715 96.944,78.562 96.596,78.562 96.249,78.562 96.096,78.41 96.096,78.207 96.249,78.054 96.596,78.054 96.944,78.054 97.096,77.902 97.096,77.699 96.944,77.546 96.596,77.546 96.249,77.546 96.096,77.394 96.096,77.191 96.249,77.038 96.596,77.038 96.944,77.038 97.096,76.886 97.096,76.683 96.944,76.53 96.596,76.53 96.249,76.53 96.096,76.378 96.096,76.175 96.249,76.022 96.596,76.022 96.944,76.022 97.096,75.87 97.096,75.667 96.944,75.514 96.596,75.514 96.249,75.514 96.096,75.362 96.096,75.159 96.249,75.006 96.596,75.006 96.944,75.006 97.096,74.854 97.096,74.651 96.944,74.498 96.596,74.498 96.249,74.498 96.096,74.346 96.096,74.143 96.249,73.99 96.596,73.99 96.944,73.99 97.096,73.838 97.096,73.635 96.944,73.482 96.596,73.482 96.249,73.482 96.096,73.33 96.096,73.127 96.249,72.974 96.596,72.974 96.944,72.974 97.096,72.822 97.096,72.619 96.944,72.466 96.596,72.466 96.249,72.466 96.096,72.314 96.096,72.111 96.249,71.958 96.596,71.958 96.944,71.958 97.096,71.806 97.096,71.603 96.944,71.45 96.596,71.45 96.249,71.45 96.096,71.298 96.096,71.095 96.249,70.942 96.596,70.942 96.944,70.942 97.096,70.79 97.096,70.587 96.944,70.434 96.596,70.434 96.249,70.434 96.096,70.282 96.096,70.079 96.249,69.926 96.596,69.926 96.944,69.926 97.096,69.774 97.096,69.571 96.944,69.418 96.596,69.418 96.249,69.418 96.096,69.266 96.096,69.063 96.249,68.91 96.596,68.91 96.944,68.91 97.096,68.758 97.096,68.555 96.944,68.402 96.596,68.402 96.249,68.402 96.096,68.25 96.096,68.047 96.249,67.894 96.596,67.894 96.944,67.894 97.096,67.742 97.096,67.539 96.944,67.386 96.596,67.386 96.249,67.386 96.096,67.234 96.096,67.031 96.249,66.878 96.596,66.878 96.944,66.878 97.096,66.726 97.096,66.523 96.944,66.37 96.596,66.37 96.249,66.37 96.096,66.218 96.096,66.015 96.249,65.862 96.596,65.862 96.944,65.862 97.096,65.71 97.096,65.507 96.944,65.354 96.596,65.354 96.249,65.354 96.096,65.202 96.096,64.999 96.249,64.846 96.596,64.846 96.944,64.846 97.096,64.694 97.096,64.491 96.944,64.338 96.596,64.338 96.249,64.338 96.096,64.186 96.096,63.983 96.249,63.83 96.596,63.83 96.944,63.83 97.096,63.678 97.096,63.475 96.944,63.322 96.596,63.322 96.249,63.322 96.096,63.17 96.096,62.967 96.249,62.814 96.596,62.814 96.944,62.814 97.096,62.662 97.096,62.459 96.944,62.306 96.596,62.306 96.249,62.306 96.096,62.154 96.096,61.951 96.249,61.798 96.596,61.798 96.944,61.798 97.096,61.646 97.096,61.443 96.944,61.29 96.596,61.29 96.249,61.29 96.096,61.138 96.096,60.935 96.249,60.782 96.596,60.782 96.944,60.782 97.096,60.63 97.096,60.427 96.944,60.274 96.596,60.274 96.249,60.274 96.096,60.122 96.096,59.919 96.249,59.766 96.596,59.766 96.944,59.766 97.096,59.614 97.096,59.411 96.944,59.258 96.596,59.258 96.249,59.258 96.096,59.106 96.096,58.903 96.249,58.75 96.596,58.75 96.944,58.75 97.096,58.598 97.096,58.395 96.944,58.242 96.596,58.242 96.249,58.242 96.096,58.09 96.096,57.887 96.249,57.734 96.596,57.734 96.944,57.734 97.096,57.582 97.096,57.379 96.944,57.226 96.749,57.226 96.596,57.074 96.596,54.966 96.596,23.19 92.9,19.494 P2.53@92.9,12.425
D4_1: P1.12 P2.16 | length 131.9
  Top Layer w0.254: P1.12@26.187,35.951 27.523,37.287 31.013,37.287 34.849,41.123 34.849,50.343 38.913,54.407 39.548,54.407 39.649,54.407 39.802,54.559 39.802,54.754 39.954,54.907 40.157,54.907 40.31,54.754 40.31,54.407 40.31,54.059 40.462,53.907 40.665,53.907 40.818,54.059 40.818,54.407 40.818,54.754 40.97,54.907 41.173,54.907 41.326,54.754 41.326,54.407 41.326,54.059 41.478,53.907 41.681,53.907 41.834,54.059 41.834,54.407 41.834,54.754 41.986,54.907 42.189,54.907 42.342,54.754 42.342,54.407 42.342,54.059 42.494,53.907 42.697,53.907 42.85,54.059 42.85,54.407 42.85,54.754 43.002,54.907 43.205,54.907 43.358,54.754 43.358,54.407 43.358,54.059 43.51,53.907 43.713,53.907 43.866,54.059 43.866,54.407 43.866,54.754 44.018,54.907 44.221,54.907 44.374,54.754 44.374,54.407 44.374,54.059 44.526,53.907 44.729,53.907 44.882,54.059 44.882,54.407 44.882,54.754 45.034,54.907 45.237,54.907 45.39,54.754 45.39,54.407 45.39,54.059 45.542,53.907 45.745,53.907 45.898,54.059 45.898,54.407 45.898,54.754 46.05,54.907 46.253,54.907 46.406,54.754 46.406,54.407 46.406,54.059 46.558,53.907 46.761,53.907 46.914,54.059 46.914,54.407 46.914,54.754 47.066,54.907 47.269,54.907 47.422,54.754 47.422,54.407 47.422,54.059 47.574,53.907 47.777,53.907 47.93,54.059 47.93,54.407 47.93,54.754 48.082,54.907 48.285,54.907 48.438,54.754 48.438,54.407 48.438,54.059 48.59,53.907 48.793,53.907 48.946,54.059 48.946,54.407 48.946,54.754 49.098,54.907 49.301,54.907 49.454,54.754 49.454,54.559 49.606,54.407 51.384,54.407 60.3,54.407 62.23,52.476 62.23,51.994 62.23,51.892 62.382,51.74 62.578,51.74 62.73,51.587 62.73,51.384 62.578,51.232 62.23,51.232 61.882,51.232 61.73,51.079 61.73,50.876 61.882,50.724 62.23,50.724 62.578,50.724 62.73,50.571 62.73,50.368 62.578,50.216 62.23,50.216 61.882,50.216 61.73,50.063 61.73,49.86 61.882,49.708 62.23,49.708 62.578,49.708 62.73,49.555 62.73,49.352 62.578,49.2 62.23,49.2 61.882,49.2 61.73,49.047 61.73,48.844 61.882,48.692 62.23,48.692 62.578,48.692 62.73,48.539 62.73,48.336 62.578,48.184 62.23,48.184 61.882,48.184 61.73,48.031 61.73,47.828 61.882,47.676 62.23,47.676 62.578,47.676 62.73,47.523 62.73,47.32 62.578,47.168 62.23,47.168 61.882,47.168 61.73,47.015 61.73,46.812 61.882,46.66 62.23,46.66 62.578,46.66 62.73,46.507 62.73,46.304 62.578,46.152 62.23,46.152 61.882,46.152 61.73,45.999 61.73,45.796 61.882,45.644 62.23,45.644 62.578,45.644 62.73,45.491 62.73,45.288 62.578,45.136 62.23,45.136 61.882,45.136 61.73,44.983 61.73,44.78 61.882,44.628 62.23,44.628 62.578,44.628 62.73,44.475 62.73,44.272 62.578,44.12 62.23,44.12 61.882,44.12 61.73,43.967 61.73,43.764 61.882,43.612 62.078,43.612 62.23,43.459 62.23,43.18 62.23,35.611 77.7,20.141 v2(77.7,6.948)
  Bottom Layer w0.254: v2(77.7,6.948) P2.16@77.7,8.625
D4_2: P2.34 P3.12 | length 132.3
  Top Layer w0.254: P3.12@26.187,85.951 27.353,84.785 42.951,84.785 46.279,81.458 46.279,71.806 52.273,65.811 71.018,65.811 77.241,59.588 77.241,58.776 77.241,58.674 77.394,58.522 77.589,58.522 77.741,58.369 77.741,58.166 77.589,58.014 77.241,58.014 76.894,58.014 76.741,57.861 76.741,57.658 76.894,57.506 77.241,57.506 77.589,57.506 77.741,57.353 77.741,57.15 77.589,56.998 77.241,56.998 76.894,56.998 76.741,56.845 76.741,56.642 76.894,56.49 77.241,56.49 77.589,56.49 77.741,56.337 77.741,56.134 77.589,55.982 77.241,55.982 76.894,55.982 76.741,55.829 76.741,55.626 76.894,55.474 77.241,55.474 77.589,55.474 77.741,55.321 77.741,55.118 77.589,54.966 77.241,54.966 76.894,54.966 76.741,54.813 76.741,54.61 76.894,54.458 77.241,54.458 77.589,54.458 77.741,54.305 77.741,54.102 77.589,53.95 77.241,53.95 76.894,53.95 76.741,53.797 76.741,53.594 76.894,53.442 77.241,53.442 77.589,53.442 77.741,53.289 77.741,53.086 77.589,52.934 77.241,52.934 76.894,52.934 76.741,52.781 76.741,52.578 76.894,52.426 77.241,52.426 77.589,52.426 77.741,52.273 77.741,52.07 77.589,51.918 77.394,51.918 77.241,51.765 77.241,50.673 77.241,26.721 84.9,19.062 v2(84.9,10.302)
  Bottom Layer w0.254: P2.34@84.9,8.625 v2(84.9,10.302)
D4_3: P2.52 P4.12 | length 131.7
  Top Layer w0.254: P4.12@76.187,85.951 77.43,84.709 88.697,84.709 93.37,80.035 93.37,43.815 93.37,40.361 93.218,40.208 93.023,40.208 92.87,40.056 92.87,39.853 93.023,39.7 93.37,39.7 93.718,39.7 93.87,39.548 93.87,39.345 93.718,39.192 93.37,39.192 93.023,39.192 92.87,39.04 92.87,38.837 93.023,38.684 93.37,38.684 93.718,38.684 93.87,38.532 93.87,38.329 93.718,38.176 93.37,38.176 93.023,38.176 92.87,38.024 92.87,37.821 93.023,37.668 93.37,37.668 93.718,37.668 93.87,37.516 93.87,37.313 93.718,37.16 93.37,37.16 93.023,37.16 92.87,37.008 92.87,36.805 93.023,36.652 93.37,36.652 93.718,36.652 93.87,36.5 93.87,36.297 93.718,36.144 93.37,36.144 93.023,36.144 92.87,35.992 92.87,35.789 93.023,35.636 93.37,35.636 93.718,35.636 93.87,35.484 93.87,35.281 93.718,35.128 93.37,35.128 93.023,35.128 92.87,34.976 92.87,34.773 93.023,34.62 93.37,34.62 93.718,34.62 93.87,34.468 93.87,34.265 93.718,34.112 93.37,34.112 93.023,34.112 92.87,33.96 92.87,33.757 93.023,33.604 93.37,33.604 93.718,33.604 93.87,33.452 93.87,33.249 93.718,33.096 93.37,33.096 93.023,33.096 92.87,32.944 92.87,32.741 93.023,32.588 93.37,32.588 93.718,32.588 93.87,32.436 93.87,32.233 93.718,32.08 93.37,32.08 93.023,32.08 92.87,31.928 92.87,31.725 93.023,31.572 93.37,31.572 93.718,31.572 93.87,31.42 93.87,31.217 93.718,31.064 93.37,31.064 93.023,31.064 92.87,30.912 92.87,30.709 93.023,30.556 93.37,30.556 93.718,30.556 93.87,30.404 93.87,30.201 93.718,30.048 93.37,30.048 93.023,30.048 92.87,29.896 92.87,29.693 93.023,29.54 93.37,29.54 93.718,29.54 93.87,29.388 93.87,29.185 93.718,29.032 93.37,29.032 93.023,29.032 92.87,28.88 92.87,28.677 93.023,28.524 93.37,28.524 93.718,28.524 93.87,28.372 93.87,28.169 93.718,28.016 93.37,28.016 93.023,28.016 92.87,27.864 92.87,27.661 93.023,27.508 93.37,27.508 93.718,27.508 93.87,27.356 93.87,27.153 93.718,27 93.37,27 93.023,27 92.87,26.848 92.87,26.645 93.023,26.492 93.37,26.492 93.718,26.492 93.87,26.34 93.87,26.137 93.718,25.984 93.37,25.984 93.023,25.984 92.87,25.832 92.87,25.629 93.023,25.476 93.37,25.476 93.718,25.476 93.87,25.324 93.87,25.121 93.718,24.968 93.37,24.968 93.023,24.968 92.87,24.816 92.87,24.613 93.023,24.46 93.37,24.46 93.718,24.46 93.87,24.308 93.87,24.105 93.718,23.952 93.37,23.952 93.023,23.952 92.87,23.8 92.87,23.597 93.023,23.444 93.37,23.444 93.718,23.444 93.87,23.292 93.87,23.089 93.718,22.936 93.37,22.936 93.023,22.936 92.87,22.784 92.87,22.581 93.023,22.428 93.37,22.428 93.718,22.428 93.87,22.276 93.87,22.073 93.718,21.92 93.37,21.92 93.023,21.92 92.87,21.768 92.87,21.565 93.023,21.412 93.37,21.412 93.718,21.412 93.87,21.26 93.87,21.057 93.718,20.904 93.37,20.904 93.023,20.904 92.87,20.752 92.87,20.549 93.023,20.396 93.37,20.396 93.718,20.396 93.87,20.244 93.87,20.041 93.718,19.888 93.37,19.888 93.023,19.888 92.87,19.736 92.87,19.533 93.023,19.38 93.37,19.38 93.718,19.38 93.87,19.228 93.87,19.025 93.718,18.872 93.37,18.872 93.023,18.872 92.87,18.72 92.87,18.517 93.023,18.364 93.37,18.364 93.718,18.364 93.87,18.212 93.87,18.009 93.718,17.856 93.37,17.856 93.023,17.856 92.87,17.704 92.87,17.501 93.023,17.348 93.218,17.348 93.37,17.196 93.37,17.094 93.37,16.307 92.1,15.036 v2(92.1,6.948)
  Bottom Layer w0.254: v2(92.1,6.948) P2.52@92.1,8.625
D5_1: P1.11 P2.15 | length 132.5
  Bottom Layer w0.254: P1.11@28.727,35.951 33.782,41.006 33.782,41.326 33.782,41.427 33.63,41.58 33.434,41.58 33.282,41.732 33.282,41.935 33.434,42.088 33.782,42.088 34.13,42.088 34.282,42.24 34.282,42.443 34.13,42.596 33.782,42.596 33.434,42.596 33.282,42.748 33.282,42.951 33.434,43.104 33.782,43.104 34.13,43.104 34.282,43.256 34.282,43.459 34.13,43.612 33.782,43.612 33.434,43.612 33.282,43.764 33.282,43.967 33.434,44.12 33.782,44.12 34.13,44.12 34.282,44.272 34.282,44.475 34.13,44.628 33.782,44.628 33.434,44.628 33.282,44.78 33.282,44.983 33.434,45.136 33.782,45.136 34.13,45.136 34.282,45.288 34.282,45.491 34.13,45.644 33.782,45.644 33.434,45.644 33.282,45.796 33.282,45.999 33.434,46.152 33.782,46.152 34.13,46.152 34.282,46.304 34.282,46.507 34.13,46.66 33.782,46.66 33.434,46.66 33.282,46.812 33.282,47.015 33.434,47.168 33.782,47.168 34.13,47.168 34.282,47.32 34.282,47.523 34.13,47.676 33.782,47.676 33.434,47.676 33.282,47.828 33.282,48.031 33.434,48.184 33.63,48.184 33.782,48.336 33.782,49.835 37.211,53.264 48.743,53.264 48.87,53.264 49.022,53.111 49.022,52.916 49.174,52.764 49.378,52.764 49.53,52.916 49.53,53.264 49.53,53.611 49.682,53.764 49.886,53.764 50.038,53.611 50.038,53.264 50.038,52.916 50.19,52.764 50.394,52.764 50.546,52.916 50.546,53.264 50.546,53.611 50.698,53.764 50.902,53.764 51.054,53.611 51.054,53.264 51.054,52.916 51.206,52.764 51.41,52.764 51.562,52.916 51.562,53.264 51.562,53.611 51.714,53.764 51.918,53.764 52.07,53.611 52.07,53.264 52.07,52.916 52.222,52.764 52.426,52.764 52.578,52.916 52.578,53.264 52.578,53.611 52.73,53.764 52.934,53.764 53.086,53.611 53.086,53.264 53.086,52.916 53.238,52.764 53.442,52.764 53.594,52.916 53.594,53.264 53.594,53.611 53.746,53.764 53.95,53.764 54.102,53.611 54.102,53.264 54.102,52.916 54.254,52.764 54.458,52.764 54.61,52.916 54.61,53.264 54.61,53.611 54.762,53.764 54.966,53.764 55.118,53.611 55.118,53.264 55.118,52.916 55.27,52.764 55.474,52.764 55.626,52.916 55.626,53.264 55.626,53.611 55.778,53.764 55.982,53.764 56.134,53.611 56.134,53.264 56.134,52.916 56.286,52.764 56.49,52.764 56.642,52.916 56.642,53.264 56.642,53.611 56.794,53.764 56.998,53.764 57.15,53.611 57.15,53.264 57.15,52.916 57.302,52.764 57.506,52.764 57.658,52.916 57.658,53.264 57.658,53.611 57.81,53.764 58.014,53.764 58.166,53.611 58.166,53.264 58.166,52.916 58.318,52.764 58.522,52.764 58.674,52.916 58.674,53.264 58.674,53.611 58.826,53.764 59.03,53.764 59.182,53.611 59.182,53.264 59.182,52.916 59.334,52.764 59.538,52.764 59.69,52.916 59.69,53.111 59.842,53.264 59.944,53.264 60.249,53.264 62.89,50.622 62.89,44.221 62.89,43.993 63.043,43.84 63.238,43.84 63.39,43.688 63.39,43.485 63.238,43.332 62.89,43.332 62.543,43.332 62.39,43.18 62.39,42.977 62.543,42.824 62.89,42.824 63.238,42.824 63.39,42.672 63.39,42.469 63.238,42.316 62.89,42.316 62.543,42.316 62.39,42.164 62.39,41.961 62.543,41.808 62.89,41.808 63.238,41.808 63.39,41.656 63.39,41.453 63.238,41.3 62.89,41.3 62.543,41.3 62.39,41.148 62.39,40.945 62.543,40.792 62.89,40.792 63.238,40.792 63.39,40.64 63.39,40.437 63.238,40.284 62.89,40.284 62.543,40.284 62.39,40.132 62.39,39.929 62.543,39.776 62.89,39.776 63.238,39.776 63.39,39.624 63.39,39.421 63.238,39.268 62.89,39.268 62.543,39.268 62.39,39.116 62.39,38.913 62.543,38.76 62.89,38.76 63.238,38.76 63.39,38.608 63.39,38.405 63.238,38.252 62.89,38.252 62.543,38.252 62.39,38.1 62.39,37.897 62.543,37.744 62.89,37.744 63.238,37.744 63.39,37.592 63.39,37.389 63.238,37.236 62.89,37.236 62.543,37.236 62.39,37.084 62.39,36.881 62.543,36.728 62.89,36.728 63.238,36.728 63.39,36.576 63.39,36.373 63.238,36.22 62.89,36.22 62.543,36.22 62.39,36.068 62.39,35.865 62.543,35.712 62.738,35.712 62.89,35.56 62.89,35.458 62.89,33.909 77.7,19.099 P2.15@77.7,12.425
D5_2: P2.33 P3.11 | length 132
  Bottom Layer w0.254: P3.11@28.727,85.951 40.439,85.951 44.069,82.321 44.069,73.965 56.591,61.443 75.921,61.443 78.232,59.131 78.232,39.014 78.232,38.049 78.08,37.897 77.884,37.897 77.732,37.744 77.732,37.541 77.884,37.389 78.232,37.389 78.58,37.389 78.732,37.236 78.732,37.033 78.58,36.881 78.232,36.881 77.884,36.881 77.732,36.728 77.732,36.525 77.884,36.373 78.232,36.373 78.58,36.373 78.732,36.22 78.732,36.017 78.58,35.865 78.232,35.865 77.884,35.865 77.732,35.712 77.732,35.509 77.884,35.357 78.232,35.357 78.58,35.357 78.732,35.204 78.732,35.001 78.58,34.849 78.232,34.849 77.884,34.849 77.732,34.696 77.732,34.493 77.884,34.341 78.232,34.341 78.58,34.341 78.732,34.188 78.732,33.985 78.58,33.833 78.232,33.833 77.884,33.833 77.732,33.68 77.732,33.477 77.884,33.325 78.232,33.325 78.58,33.325 78.732,33.172 78.732,32.969 78.58,32.817 78.232,32.817 77.884,32.817 77.732,32.664 77.732,32.461 77.884,32.309 78.232,32.309 78.58,32.309 78.732,32.156 78.732,31.953 78.58,31.801 78.232,31.801 77.884,31.801 77.732,31.648 77.732,31.445 77.884,31.293 78.232,31.293 78.58,31.293 78.732,31.14 78.732,30.937 78.58,30.785 78.232,30.785 77.884,30.785 77.732,30.632 77.732,30.429 77.884,30.277 78.232,30.277 78.58,30.277 78.732,30.124 78.732,29.921 78.58,29.769 78.232,29.769 77.884,29.769 77.732,29.616 77.732,29.413 77.884,29.261 78.232,29.261 78.58,29.261 78.732,29.108 78.732,28.905 78.58,28.753 78.232,28.753 77.884,28.753 77.732,28.6 77.732,28.397 77.884,28.245 78.232,28.245 78.58,28.245 78.732,28.092 78.732,27.889 78.58,27.737 78.232,27.737 77.884,27.737 77.732,27.584 77.732,27.381 77.884,27.229 78.08,27.229 78.232,27.076 78.232,26.975 78.232,25.832 84.9,19.164 P2.33@84.9,12.425